# EAGLE board Tracker_V2 (EAGLE 9.6.2)
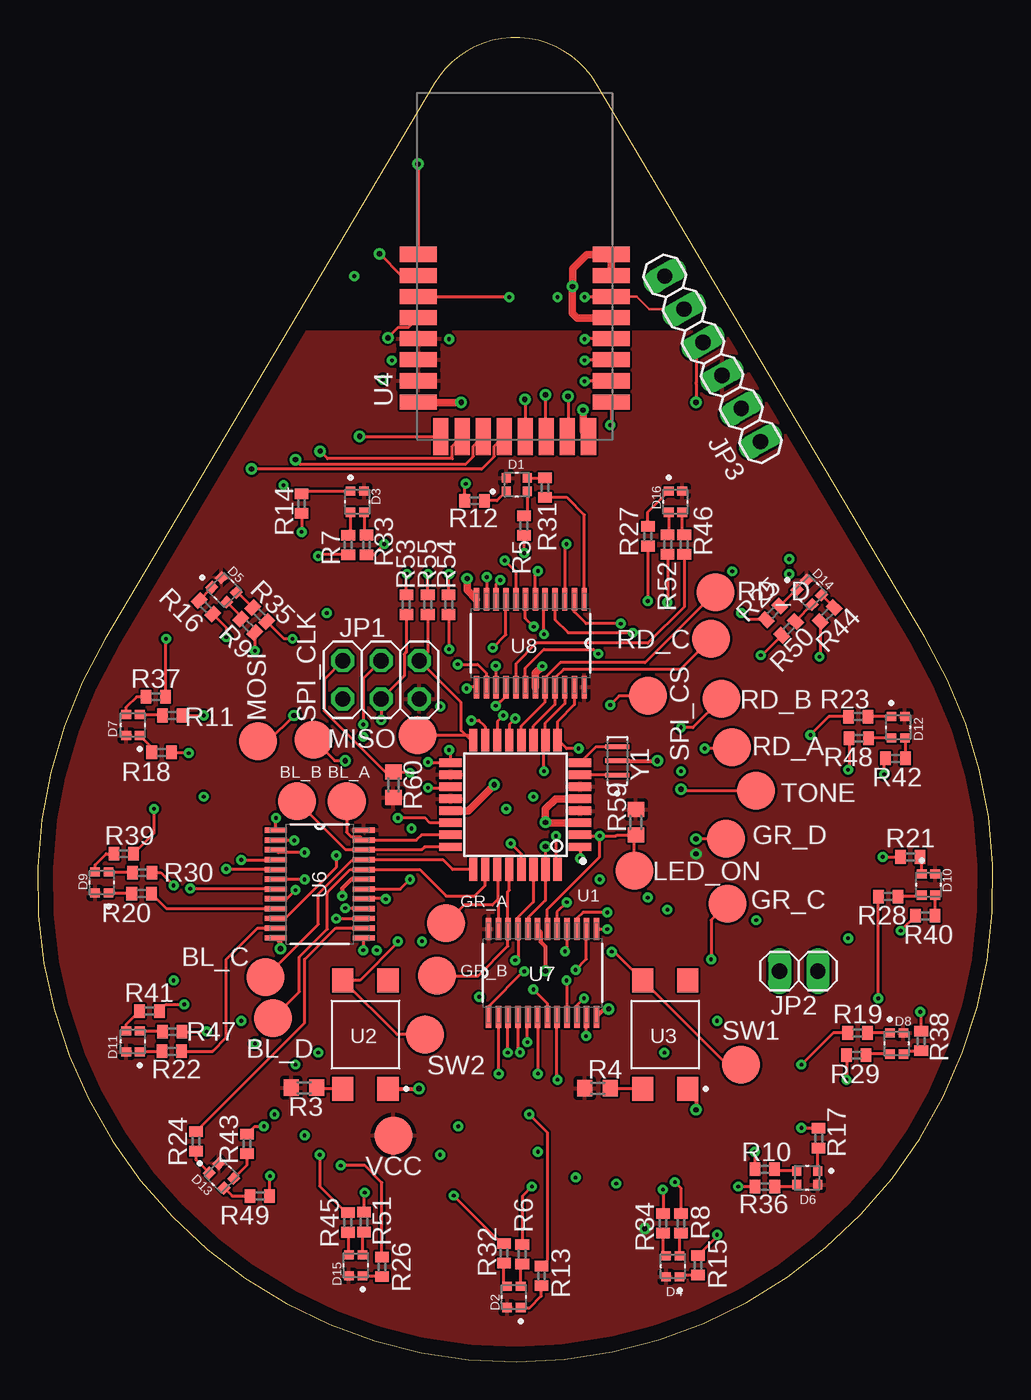
[diagram p0: board, top side]
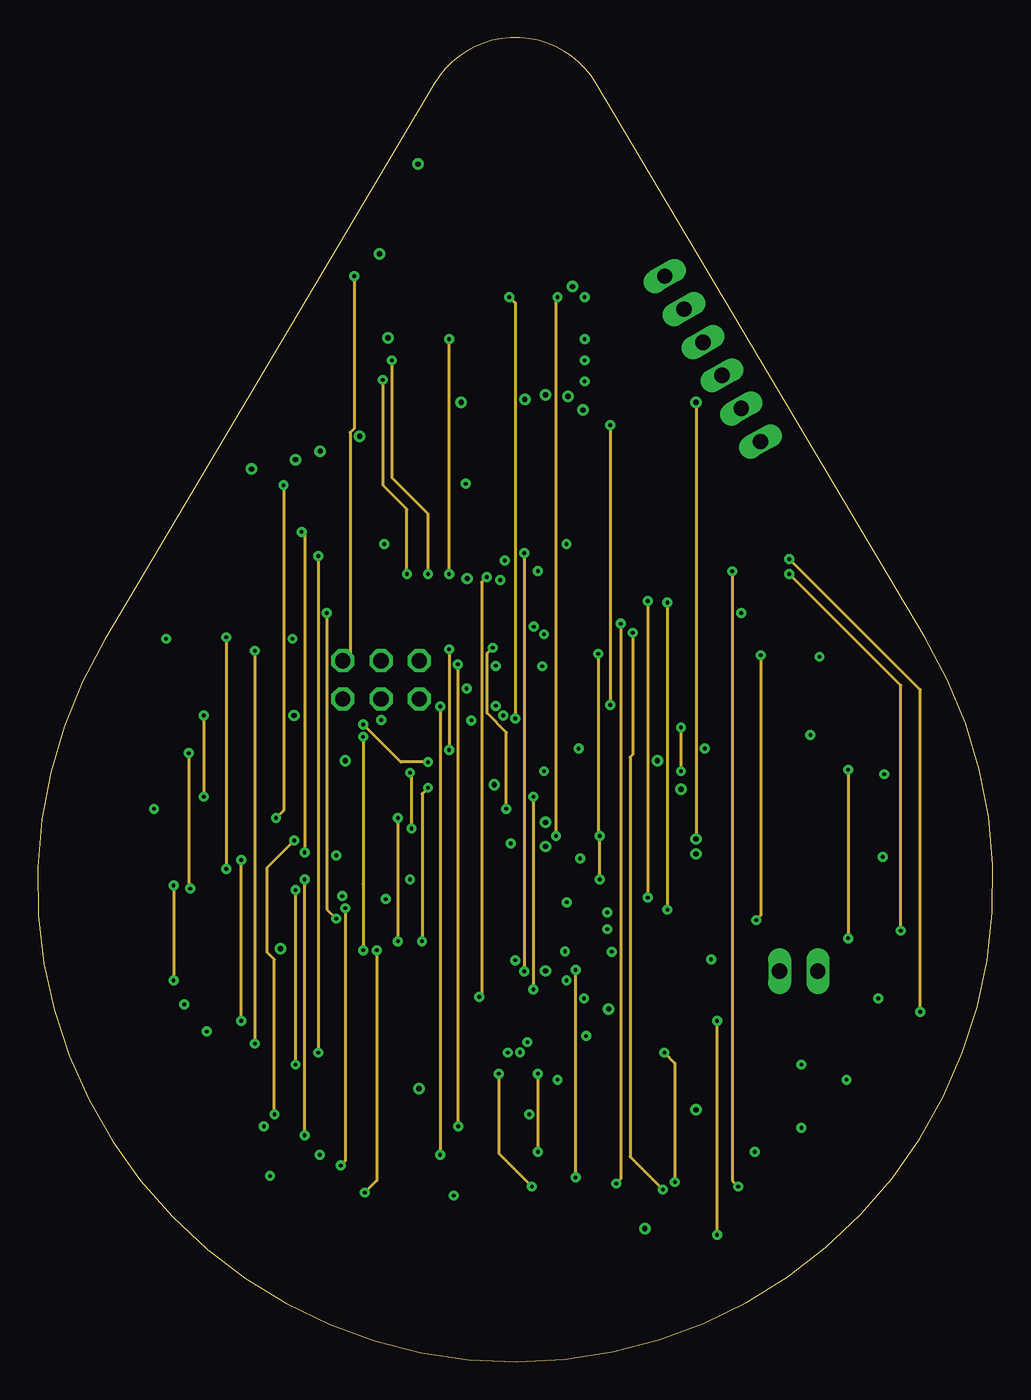
[diagram p1: board, inner layer Route2]
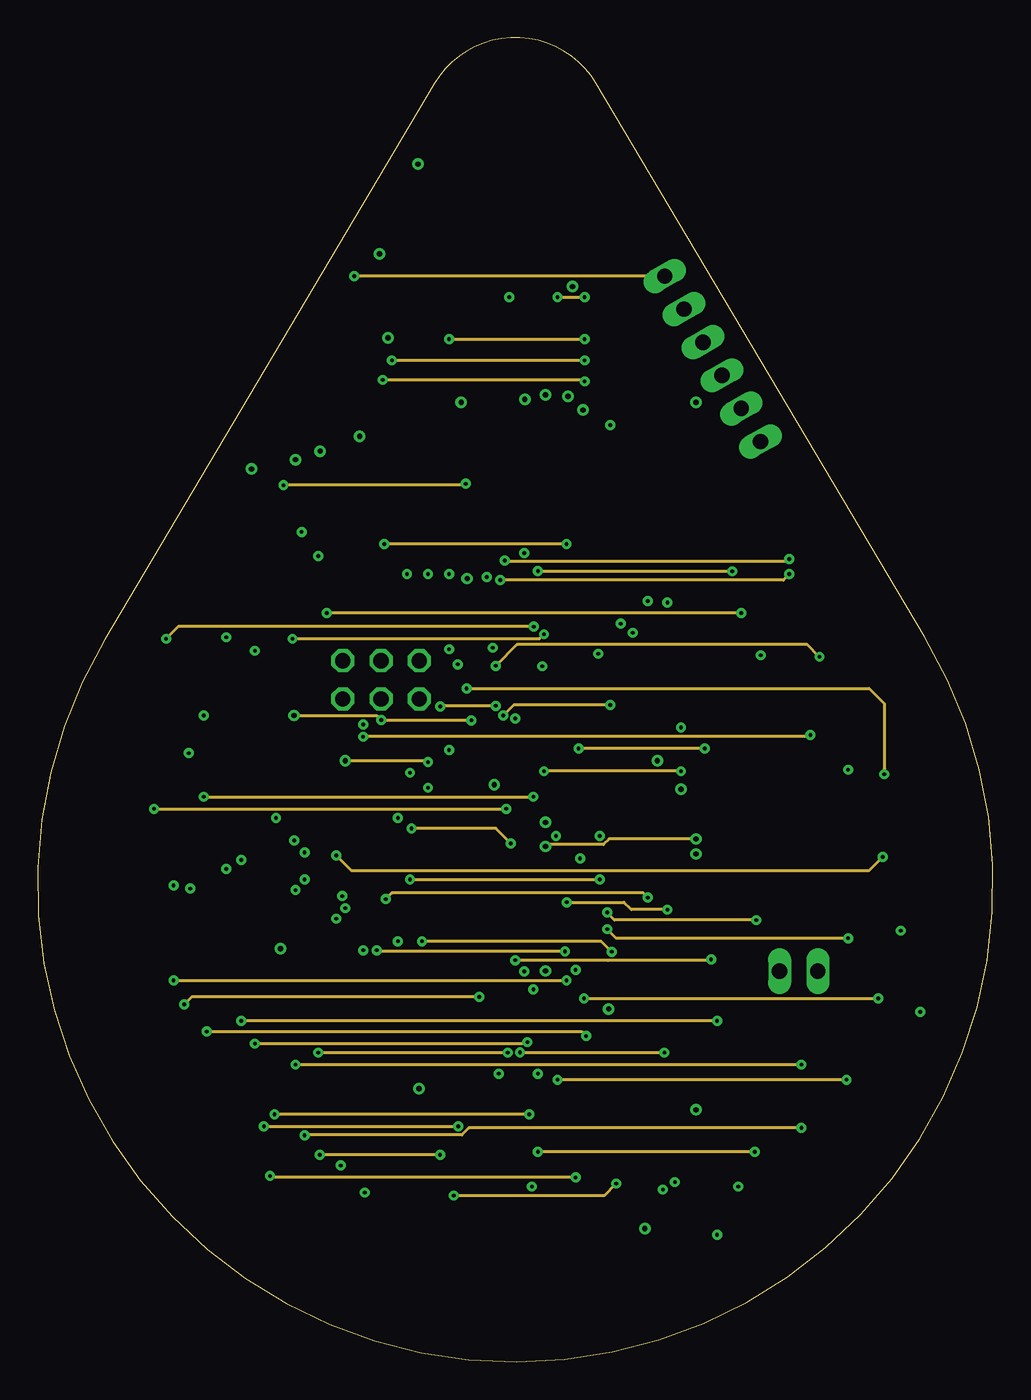
[diagram p2: board, inner layer Route15]
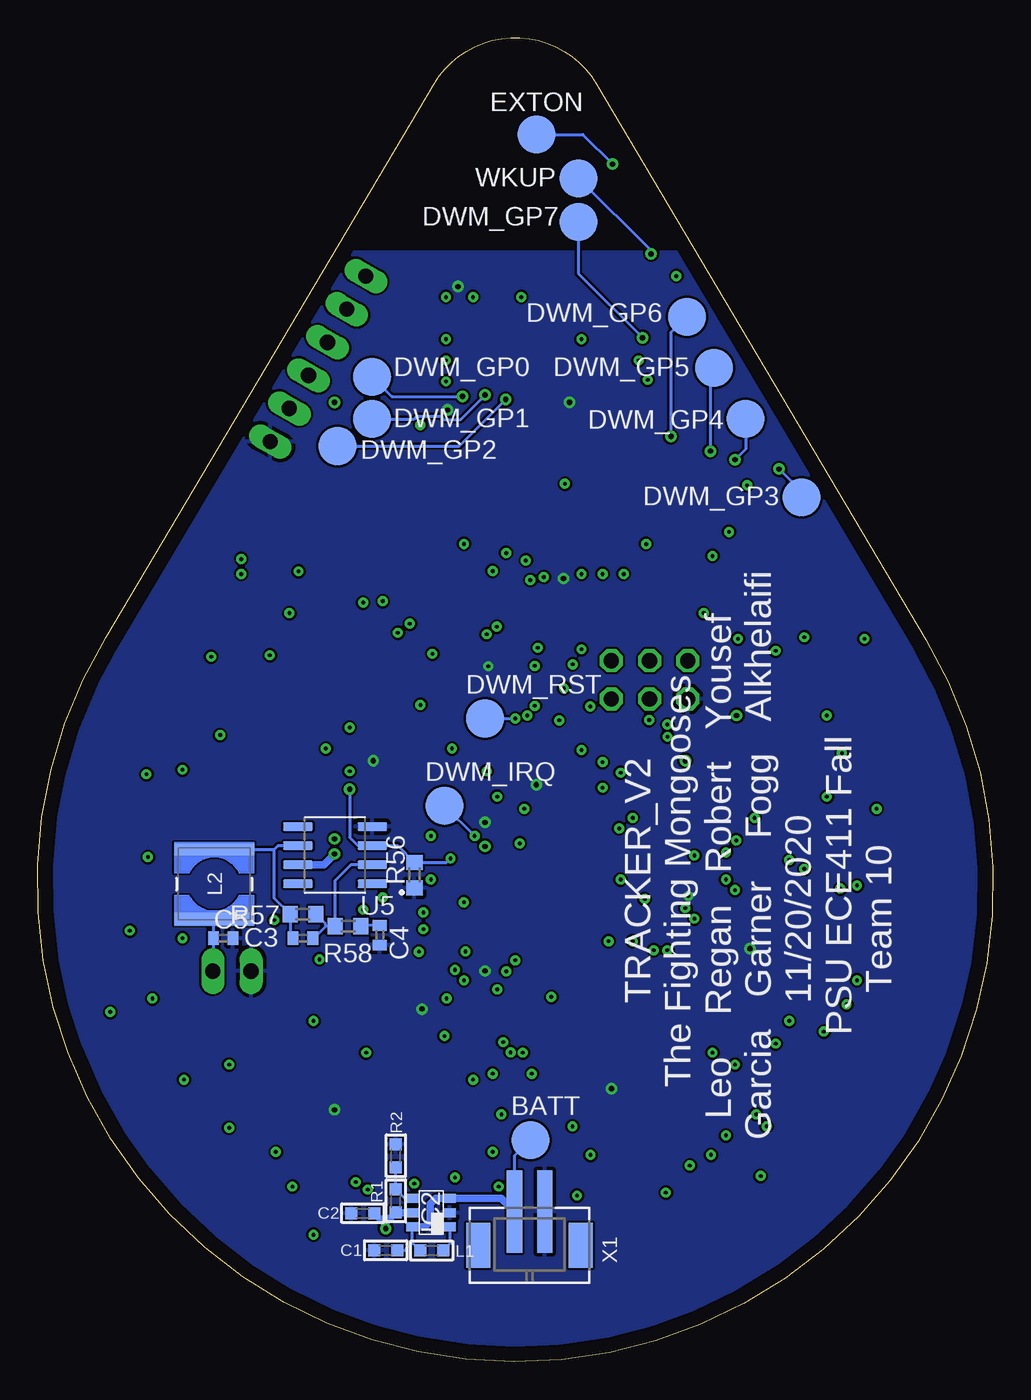
[diagram p3: board, bottom side, seen from below]

Size 63.45 x 87.99 mm. Coordinates in mm from the lower left corner, seen from the top.
Outline: 37.11,84.94 arc119 26.35,84.94
Outline: 37.11,84.94 arc119 26.35,84.94
Outline: 4.45,48 arc242 58.91,48.16
Outline: 26.35,84.94 4.45,48
Outline: 37.11,84.94 arc119 26.35,84.94
Outline: 58.91,48.16 37.11,84.94
Outline: 4.45,48 arc242 58.91,48.16
Copper layers (1+2*15+16): Top 0.035mm / dielectric 0.3mm / Route2 0.035mm / dielectric 1mm / Route15 0.035mm / dielectric 0.3mm / Bottom 0.035mm
Design rules "default *": minimum track width 6mil, minimum drill 0.25mm, track to track 6mil, track to pad 6mil, pad to pad 6mil, via to via 6mil, smd to smd 6mil, copper to edge 40mil, drill to drill 6mil, minimum pad ring 10mil, minimum via ring 8mil, stop-mask expansion 4mil, vias tented up to drill 0mil, thermal gap 10mil

## Footprints (pad centres in the part's own frame; a part is rotated, then mirrored left to right if it is on the bottom)
B2,54 = smd 2.54 x 2.54: TP 0,0
C0603 = smd 0.8 x 0.8: 1 -0.762,0; 2 0.762,0
C0402 = smd 0.7 x 0.9: 1 -0.65,0; 2 0.65,0
LED_EAST1616RGBA3 = smd 0.6 x 0.65: 1 0.7,0.45; 2 -0.7,0.45; 3 0.7,-0.45; 4 -0.7,-0.45
TSOT23-6_DDC = smd 0.6 x 0.8: 1 -0.95,-1.25; 2 0,-1.25; 3 0.95,-1.25; 4 0.95,1.25; 5 0,1.25; 6 -0.95,1.25
2X03 = drill 1.016 octagon: 1 -2.54,-1.27; 2 -2.54,1.27; 3 0,-1.27; 4 0,1.27; 5 2.54,-1.27; 6 2.54,1.27
1X02 = drill 1.016 long: 1 -1.27,0; 2 1.27,0
1X06 = drill 1.016 long: 1 -6.35,0; 2 -3.81,0; 3 -1.27,0; 4 1.27,0; 5 3.81,0; 6 6.35,0
L0603 = smd 0.8 x 0.8: 1 -0.762,0; 2 0.762,0
WE-TPC_4828 = smd 0.8 x 5.3: 1 -2.3,0; 2 2.3,0
R0603 = smd 0.8 x 0.8: 1 -0.762,0; 2 0.762,0
R0603' = smd 1 x 1.1: 1 -0.85,0; 2 0.85,0
R0402 = smd 0.7 x 0.9: 1 -0.65,0; 2 0.65,0
QFP80P900X900X120-32N = smd 1.5 x 0.55: 1 -4.3,2.8; 2 -4.3,2; 3 -4.3,1.2; 4 -4.3,0.4; 5 -4.3,-0.4; 6 -4.3,-1.2; 7 -4.3,-2; 8 -4.3,-2.8; 17 4.3,-2.8; 18 4.3,-2; 19 4.3,-1.2; 20 4.3,-0.4; 21 4.3,0.4; 22 4.3,1.2; 23 4.3,2; 24 4.3,2.8 | smd 0.55 x 1.5: 9 -2.8,-4.3; 10 -2,-4.3; 11 -1.2,-4.3; 12 -0.4,-4.3; 13 0.4,-4.3; 14 1.2,-4.3; 15 2,-4.3; 16 2.8,-4.3; 25 2.8,4.3; 26 2,4.3; 27 1.2,4.3; 28 0.4,4.3; 29 -0.4,4.3; 30 -1.2,4.3; 31 -2,4.3; 32 -2.8,4.3
SW_TL3305AF260QG = smd 1.4 x 1.6: 1 -1.5,3.6; 2 -1.5,-3.6; 3 1.5,3.6; 4 1.5,-3.6
XCVR_DWM1000 = smd 2.45 x 1: 1 -6.4,1.8; 2 -6.4,0.4; 3 -6.4,-1; 4 -6.4,-2.4; 5 -6.4,-3.8; 6 -6.4,-5.2; 7 -6.4,-6.6; 8 -6.4,-8; 17 6.4,-8; 18 6.4,-6.6; 19 6.4,-5.2; 20 6.4,-3.8; 21 6.4,-2.4; 22 6.4,-1; 23 6.4,0.4; 24 6.4,1.8 | smd 1 x 2.45: 9 -4.9,-10.295; 10 -3.5,-10.295; 11 -2.1,-10.295; 12 -0.7,-10.295; 13 0.7,-10.295; 14 2.1,-10.295; 15 3.5,-10.295; 16 4.9,-10.295
SOIC127P600X175-8N = smd 1.97 x 0.57: 1 -2.475,1.905; 2 -2.475,0.635; 3 -2.475,-0.635; 4 -2.475,-1.905; 5 2.475,-1.905; 6 2.475,-0.635; 7 2.475,0.635; 8 2.475,1.905
SOP65P640X110-24N = smd 1.473 x 0.356: 1 -2.921,3.581; 2 -2.921,2.921; 3 -2.921,2.286; 4 -2.921,1.626; 5 -2.921,0.965; 6 -2.921,0.33; 7 -2.921,-0.33; 8 -2.921,-0.965; 9 -2.921,-1.626; 10 -2.921,-2.286; 11 -2.921,-2.921; 12 -2.921,-3.581; 13 2.921,-3.581; 14 2.921,-2.921; 15 2.921,-2.286; 16 2.921,-1.626; 17 2.921,-0.965; 18 2.921,-0.33; 19 2.921,0.33; 20 2.921,0.965; 21 2.921,1.626; 22 2.921,2.286; 23 2.921,2.921; 24 2.921,3.581
B2B-PH-SM4-TB = smd 1 x 5.5: 1 1,0; 2 -1,0 | smd 1.6 x 3: M1 3.4,-2.25; M2 -3.4,-2.25
OSC_CSTCE16M0V53-R0 = smd 0.3 x 1.6: 1 -0.95,0; 2 0,0; 3 0.95,0

## Placement (x,y rotation side)
BATT  TPB2,54  [B2,54]  30.73,14.75 0 bottom
BL_A  TPB2,54  [B2,54]  20.53,37.25 0 top
BL_B  TPB2,54  [B2,54]  17.23,37.25 0 top
BL_C  TPB2,54  [B2,54]  15.13,25.55 0 top
BL_D  TPB2,54  [B2,54]  15.63,22.85 0 top
C1  10u  [C0603]  40.34,7.41 0 bottom
C2  10u  [C0603]  41.85,9.88 0 bottom
C3  47pF  [C0402]  45.83,28.15 0 bottom
C4  1uF  [C0402]  40.73,28.35 270 bottom
C5  4.7uF  [C0402]  51.13,28.15 0 bottom
D1  LED_EAST1616RGBA3  [LED_EAST1616RGBA3]  31.83,58.29 180 top
D2  LED_EAST1616RGBA3  [LED_EAST1616RGBA3]  31.63,4.31 270 top
D3  LED_EAST1616RGBA3  [LED_EAST1616RGBA3]  21.23,57.15 90 top
D4  LED_EAST1616RGBA3  [LED_EAST1616RGBA3]  42.19,6.35 270 top
D5  LED_EAST1616RGBA3  [LED_EAST1616RGBA3]  12.38,51.3 135 top
D6  LED_EAST1616RGBA3  [LED_EAST1616RGBA3]  51.11,12.23 0 top
D7  LED_EAST1616RGBA3  [LED_EAST1616RGBA3]  6.33,42.31 270 top
D8  LED_EAST1616RGBA3  [LED_EAST1616RGBA3]  57.06,21.15 90 top
D9  LED_EAST1616RGBA3  [LED_EAST1616RGBA3]  4.26,31.85 270 top
D10  LED_EAST1616RGBA3  [LED_EAST1616RGBA3]  59.17,31.71 90 top
D11  LED_EAST1616RGBA3  [LED_EAST1616RGBA3]  6.33,21.29 270 top
D12  LED_EAST1616RGBA3  [LED_EAST1616RGBA3]  57.16,42.17 90 top
D13  LED_EAST1616RGBA3  [LED_EAST1616RGBA3]  12.21,12.37 135 top
D14  LED_EAST1616RGBA3  [LED_EAST1616RGBA3]  51.25,51.13 135 top
D15  LED_EAST1616RGBA3  [LED_EAST1616RGBA3]  21.13,6.42 270 top
D16  LED_EAST1616RGBA3  [LED_EAST1616RGBA3]  42.36,57.15 90 top
DWM_GP0  TPB2,54  [B2,54]  41.23,65.45 0 bottom
DWM_GP1  TPB2,54  [B2,54]  41.23,62.65 0 bottom
DWM_GP2  TPB2,54  [B2,54]  43.53,60.85 0 bottom
DWM_GP3  TPB2,54  [B2,54]  12.73,57.45 0 bottom
DWM_GP4  TPB2,54  [B2,54]  16.43,62.65 0 bottom
DWM_GP5  TPB2,54  [B2,54]  18.53,66.05 0 bottom
DWM_GP6  TPB2,54  [B2,54]  20.33,69.45 0 bottom
DWM_GP7  TPB2,54  [B2,54]  27.53,75.75 0 bottom
DWM_IRQ  TPB2,54  [B2,54]  36.43,36.95 0 bottom
DWM_RST  TPB2,54  [B2,54]  33.73,42.75 0 bottom
EXTON  TPB2,54  [B2,54]  30.33,81.55 0 bottom
GR_A  TPB2,54  [B2,54]  27.13,29.15 0 top
GR_B  TPB2,54  [B2,54]  26.53,25.65 0 top
GR_C  TPB2,54  [B2,54]  45.83,30.45 0 top
GR_D  TPB2,54  [B2,54]  45.73,34.75 0 top
IC2  TPS61070DDC  [TSOT23-6_DDC]  37.32,9.91 90 bottom
JP1  [2X03]  22.81,45.32 180 top
JP2  [1X02]  50.55,25.97 180 top
JP3  [1X06]  44.83,66.65 120 top
L1  4.7u  [L0603]  37.28,7.4 180 bottom
L2  1500uH  [WE-TPC_4828]  51.73,31.75 270 bottom
LED_ON  TPB2,54  [B2,54]  39.63,32.65 0 top
MISO  TPB2,54  [B2,54]  25.23,41.65 0 top
MOSI  TPB2,54  [B2,54]  14.63,41.25 0 top
R1  1M  [R0603]  39.66,10.7 270 bottom
R2  178k  [R0603]  39.66,13.7 270 bottom
R3  10k  [R0603']  17.7,18.21 0 top
R4  10k  [R0603']  37.19,18.18 0 top
R5  750 1%  [R0402]  32.29,55.56 90 top
R6  750 1%  [R0402]  32.19,7.16 270 top
R7  750 1%  [R0402]  20.63,54.28 90 top
R8  750 1%  [R0402]  42.73,9.2 270 top
R9  750 1%  [R0402]  13.95,48.91 135 top
R10  750 1%  [R0402]  48.3,12.8 0 top
R11  750 1%  [R0402]  8.93,42.95 180 top
R12  750 1%  [R0402]  29.02,57.22 0 top
R13  750 1%  [R0402]  33.46,5.71 270 top
R14  750 1%  [R0402]  17.53,57.03 90 top
R15  750 1%  [R0402]  43.87,6.42 270 top
R16  750 1%  [R0402]  11.18,50.14 135 top
R17  750 1%  [R0402]  51.88,14.87 270 top
R18  750 1%  [R0402]  8.23,40.5 180 top
R19  750 1%  [R0402]  54.46,21.86 0 top
R20  750 1%  [R0402]  6.9,31.12 180 top
R21  750 1%  [R0402]  57.97,33.55 0 top
R22  750 1%  [R0402]  8.92,20.64 180 top
R23  750 1%  [R0402]  54.5,42.88 0 top
R24  750 1%  [R0402]  10.52,14.66 270 top
R25  750 1%  [R0402]  48.84,49.77 45 top
R26  750 1%  [R0402]  22.87,6.31 270 top
R27  750 1%  [R0402]  40.53,54.86 90 top
R28  750 1%  [R0402]  56.49,30.92 0 top
R29  750 1%  [R0402]  54.38,20.38 0 top
R30  750 1%  [R0402]  6.94,32.51 180 top
R31  750 1%  [R0402]  33.7,58.09 90 top
R32  750 1%  [R0402]  30.97,7.22 270 top
R33  750 1%  [R0402]  21.84,54.29 90 top
R34  750 1%  [R0402]  41.54,9.2 270 top
R35  750 1%  [R0402]  14.75,49.66 135 top
R36  750 1%  [R0402]  48.31,11.64 0 top
R37  750 1%  [R0402]  7.85,44.19 180 top
R38  750 1%  [R0402]  58.69,21.32 270 top
R39  750 1%  [R0402]  5.71,33.76 180 top
R40  750 1%  [R0402]  58.96,29.64 0 top
R41  750 1%  [R0402]  7.43,23.32 180 top
R42  750 1%  [R0402]  56.98,40.1 0 top
R43  750 1%  [R0402]  13.91,14.5 270 top
R44  750 1%  [R0402]  52.44,49.66 45 top
R45  750 1%  [R0402]  20.6,9.26 270 top
R46  750 1%  [R0402]  42.95,54.31 90 top
R47  750 1%  [R0402]  8.94,21.94 180 top
R48  750 1%  [R0402]  54.55,41.44 0 top
R49  750 1%  [R0402]  14.76,11.03 180 top
R50  750 1%  [R0402]  49.88,48.74 45 top
R51  750 1%  [R0402]  21.67,9.29 270 top
R52  750 1%  [R0402]  41.85,54.32 90 top
R53  0  [R0402]  24.49,50.31 90 top
R54  0  [R0402]  27.3,50.31 90 top
R55  0  [R0402]  25.91,50.31 90 top
R56  1M  [R0603']  38.43,32.35 90 bottom
R57  220k  [R0603']  45.83,29.75 0 bottom
R58  10k  [R0603']  42.83,28.95 180 bottom
R59  10k  [R0603']  39.73,35.85 90 top
R60  10k  [R0603']  23.63,38.35 270 top
RD_A  TPB2,54  [B2,54]  46.13,40.85 0 top
RD_B  TPB2,54  [B2,54]  45.43,44.05 0 top
RD_C  TPB2,54  [B2,54]  44.73,48.05 0 top
RD_D  TPB2,54  [B2,54]  45.03,51.15 0 top
SPI_CLK  TPB2,54  [B2,54]  18.33,41.35 0 top
SPI_CS  TPB2,54  [B2,54]  40.53,44.25 270 top
SW1  TPB2,54  [B2,54]  46.73,19.75 0 top
SW2  TPB2,54  [B2,54]  25.73,21.75 0 top
TONE  TPB2,54  [B2,54]  47.73,37.95 0 top
U1  ATMEGA328P-AU  [QFP80P900X900X120-32N]  31.73,37.02 180 top
U2  TL3305AF260QG  [SW_TL3305AF260QG]  21.77,21.75 180 top
U3  TL3305AF260QG  [SW_TL3305AF260QG]  41.69,21.75 180 top
U4  DWM1000  [XCVR_DWM1000]  31.69,71.79 0 top
U5  UA741CD  [SOIC127P600X175-8N]  43.7,33.67 180 bottom
U6  74HC154PW-118  [SOP65P640X110-24N]  18.73,31.75 0 top
U7  74HC154PW-118  [SOP65P640X110-24N]  33.53,25.85 90 top
U8  74HC154PW-118  [SOP65P640X110-24N]  32.73,47.75 270 top
VCC  TPB2,54  [B2,54]  23.63,15.05 0 top
WKUP  TPB2,54  [B2,54]  27.53,78.65 0 bottom
X1  B2B-PH-SM4-TB  [B2B-PH-SM4-TB]  30.78,9.99 0 bottom
Y1  CSTCE16M0V53-R0  [OSC_CSTCE16M0V53-R0]  38.51,39.93 90 top

## Library data of the parts
BATT BL_A BL_B BL_C BL_D DWM_GP0 DWM_GP1-DWM_GP7 DWM_IRQ DWM_RST EXTON GR_A GR_B GR_C GR_D LED_ON MISO MOSI RD_A RD_B RD_C RD_D SPI_CLK SPI_CS SW1 SW2 TONE VCC WKUP = testpad
C1 C2 = rc-master-smd; C1: 10uF
C3-C5 = rcl; SPICEPREFIX: C
D1-D16 = LED_EAST1616RGBA3
IC2 = texas; MPN: TPS61070DDCR; OC_FARNELL: 1461062; OC_NEWARK: 64M3125
JP1-JP3 = pinhead
L1 = rc-master-smd; L1: 4.7uH
L2 = Eagle_WE-TPC_rev19a; DATASHEET-URL: https://katalog.we-online.com/pbs/datasheet/744043152.pdf; FRES: 2MHz; IR: 0.09A; ISAT: 0.05A; PART-NUMBER: 744043152; RDC-MAX: 9000mOhm; RDC-TYP: 6800mOhm
R1 R2 = rc-master-smd
R3-R55 = resistor
R56-R60 = rcl; SPICEPREFIX: R
U1 = ATMEGA328P-AU; AVAILABILITY: Good; DESCRIPTION: AVR AVR® ATmega Microcontroller IC 8-Bit 20MHz 32KB (16K x 16) FLASH 32-TQFP (7x7); MF: Microchip Technology; MP: ATMEGA328P-AU; PACKAGE: TQFP-32 Microchip Technology; PRICE: None; PURCHASE-URL: https://pricing.snapeda.com/search/part/ATMEGA328P-AU/?ref=eda
U2 U3 = TL3305AF260QG; AVAILABILITY: Warning; DESCRIPTION: Tactile Switch SPST-NO Top Actuated Surface Mount; MF: E-Switch; MP: TL3305AF260QG; PACKAGE: LQFP-48 E-Switch; PRICE: None; PURCHASE-URL: https://pricing.snapeda.com/search/part/TL3305AF260QG/?ref=eda
U4 = DWM1000; AVAILABILITY: Warning; DESCRIPTION: 802.15.4 IR-UWB Transceiver Module 3.5GHz ~ 6.5GHz Integrated, Chip Surface Mount; MF: Decawave Limited; MP: DWM1000; PACKAGE: Module Decawave; PRICE: None; PURCHASE-URL: https://pricing.snapeda.com/search/part/DWM1000/?ref=eda
U5 = UA741CD; AVAILABILITY: Good; DESCRIPTION: General Purpose Amplifier 1 Circuit 8-SO; MF: STMicroelectronics; MP: UA741CD; PACKAGE: SOIC-8 STMicroelectronics; PRICE: None; PURCHASE-URL: https://pricing.snapeda.com/search/part/UA741CD/?ref=eda
U6-U8 = 74HC154PW-118
X1 = con-JST PH
Y1 = CSTCE16M0V53-R0; AVAILABILITY: Bad; DESCRIPTION: 16MHz Ceramic Resonator Built in Capacitor 15pF ±0.3% -20°C ~ 80°C Surface Mount; MF: Murata; MP: CSTCE16M0V53-R0; PACKAGE: SMD-3 Murata; PRICE: None

## Nets
BL_A: BL_A.TP U1.23 U6.23
BL_B: BL_B.TP U1.24 U6.22
BL_C: BL_C.TP U1.25 U6.21
BL_D: BL_D.TP U1.26 U6.20
GND: C1.1 C2.1 C4.2 C5.2 IC2.2 JP1.6 JP2.2 JP3.1 R2.1 R56.1 U1.3 U1.5 U1.21 U2.1 U3.1 U4.8 U4.16 U4.21 U4.23 U4.24 U5.4 U6.12 U6.19 U7.12 U7.19 U8.12 U8.19 X1.1 Y1.2
GR_A: GR_A.TP U1.27 U7.23
GR_B: GR_B.TP U1.28 U7.22
GR_C: GR_C.TP U1.30 U7.21
GR_D: GR_D.TP JP3.4 U1.31 U7.20
LED_ON: LED_ON.TP R59.1 U1.2 U6.18 U7.18 U8.18
N$1: IC2.1 L1.1
N$2: BATT.TP C1.2 IC2.3 IC2.6 L1.2 X1.2
N$3: R4.2 U3.3
N$4: D1.1 R12.2
N$5: R3.2 U2.3
N$6: IC2.4 R1.1 R2.2
N$7: D7.1 R18.2
N$8: D3.1 R14.2
N$9: D4.1 R15.2
N$10: D5.1 R16.2
N$11: D6.1 R17.2
N$12: D2.1 R13.2
N$13: D8.1 R19.2
N$14: D9.1 R20.2
N$15: D10.1 R21.2
N$16: D11.1 R22.2
N$17: D12.1 R23.2
N$18: D13.1 R24.2
N$19: D14.1 R25.2
N$20: D15.1 R26.2
N$21: D16.1 R27.2
N$22: R5.1 U7.1
N$23: R6.1 U7.2
N$24: R7.1 U7.3
N$25: D4.2 R8.2
N$26: D5.2 R9.2
N$27: D7.2 R11.2
N$28: D6.2 R10.2
N$29: D8.2 R29.2
N$30: D9.2 R30.2
N$31: R28.1 U7.10
N$32: D11.2 R47.2
N$33: D12.2 R48.2
N$34: R49.1 U7.14
N$35: R50.1 U7.15
N$36: R51.1 U7.16
N$37: R52.1 U7.17
N$38: D16.4 R46.2
N$39: D15.4 R45.2
N$40: D14.4 R44.2
N$41: D13.4 R43.2
N$42: D12.4 R42.2
N$43: D11.4 R41.2
N$44: D10.4 R40.2
N$45: D9.4 R39.2
N$46: D8.4 R38.2
N$47: D7.4 R37.2
N$48: D6.4 R36.2
N$49: D5.4 R35.2
N$50: D4.4 R34.2
N$51: D3.4 R33.2
N$52: D2.4 R32.2
N$53: D1.4 R31.2
N$54: D1.2 R5.2
N$55: D2.2 R6.2
N$56: D3.2 R7.2
N$57: R8.1 U7.4
N$58: R9.1 U7.5
N$59: R10.1 U7.6
N$60: R11.1 U7.7
N$61: R12.1 U6.1
N$62: R13.1 U6.2
N$63: R14.1 U6.3
N$64: R15.1 U6.4
N$65: R16.1 U6.5
N$66: R17.1 U6.6
N$67: R18.1 U6.7
N$68: R19.1 U6.8
N$69: R20.1 U6.9
N$70: R21.1 U6.10
N$71: R22.1 U6.11
N$72: R23.1 U6.13
N$73: R24.1 U6.14
N$74: R25.1 U6.15
N$75: R26.1 U6.16
N$76: R27.1 U6.17
N$77: R29.1 U7.8
N$78: R30.1 U7.9
N$79: D10.2 R28.2
N$80: R31.1 U8.1
N$81: R32.1 U8.2
N$82: R33.1 U8.3
N$83: R34.1 U8.4
N$84: R35.1 U8.5
N$85: R36.1 U8.6
N$86: R37.1 U8.7
N$87: R38.1 U8.8
N$88: R39.1 U8.9
N$89: R40.1 U8.10
N$90: R41.1 U8.11
N$91: R42.1 U8.13
N$92: R43.1 U8.14
N$93: R44.1 U8.15
N$94: R45.1 U8.16
N$95: R46.1 U8.17
N$96: R47.1 U7.11
N$97: R48.1 U7.13
N$98: D13.2 R49.2
N$99: D14.2 R50.2
N$100: D15.2 R51.2
N$101: D16.2 R52.2
N$102: SPI_CS.TP U1.14 U4.17
N$103: JP1.4 MOSI.TP R53.1 U1.15
N$104: JP1.1 MISO.TP R55.1 U1.16
N$105: JP1.3 R54.1 SPI_CLK.TP U1.17
N$106: DWM_RST.TP U1.13 U4.3
N$107: DWM_IRQ.TP JP3.5 U1.32 U4.22
N$108: U1.8 Y1.3
N$109: U1.7 Y1.1
N$110: JP1.5 JP3.6 R60.1 U1.29
N$111: R53.2 U4.18
N$112: R54.2 U4.20
N$113: R55.2 U4.19
N$114: R56.2 TONE.TP U1.1 U5.3
N$115: C3.1 L2.1 R57.1 U5.6
N$116: C5.1 JP2.1 L2.2
N$117: C3.2 R57.2 R58.2 U5.2
N$118: C4.1 R58.1
N$119: DWM_GP7.TP U4.4
N$120: DWM_GP6.TP U4.9
N$121: DWM_GP5.TP U4.10
N$122: DWM_GP4.TP U4.11
N$123: DWM_GP3.TP U4.12
N$124: DWM_GP2.TP U4.13
N$125: DWM_GP1.TP U4.14
N$126: DWM_GP0.TP U4.15
N$127: U4.2 WKUP.TP
N$128: EXTON.TP U4.1
RD_A: RD_A.TP U1.9 U8.23
RD_B: RD_B.TP U1.10 U8.22
RD_C: RD_C.TP U1.11 U8.21
RD_D: RD_D.TP U1.12 U8.20
SW1: SW1.TP U1.19 U3.4
SW2: SW2.TP U1.22 U2.4
VCC: C2.2 D1.3 D2.3 D3.3 D4.3 D5.3 D6.3 D7.3 D8.3 D9.3 D10.3 D11.3 D12.3 D13.3 D14.3 D15.3 D16.3 IC2.5 JP1.2 JP3.3 R1.2 R3.1 R4.1 R59.2 R60.2 U1.4 U1.6 U1.18 U1.20 U4.5 U4.6 U4.7 U5.7 U6.24 U7.24 U8.24 VCC.TP

## Tracks (layer width: path | path; a pad name or v marks a point on that pad's centre or on a via)
BL_A
  Top 0.2: U1.23 25.5,35.02 25.15,34.67 U6.23 21.42,34.9 20.81,34.9 20.53,35.18 BL_A.TP
BL_B
  Top 0.2: U1.24 25.7,34.22 25.52,34.04 U6.22 20.44,34.04 BL_B.TP
BL_C
  Top 0.2: U1.25 27.56,32.72 26.9,33.38 U6.21 21.62,33.34 20.91,33.34 18.65,31.08 18.65,29.07 BL_C.TP
BL_D
  Top 0.2: U1.26 29.73,31.65 29.03,30.95 27.13,30.95 25.37,32.71 U6.20 20.78,32.71 19.25,31.19 19.25,28.77 17.38,26.9 17.38,24.6 BL_D.TP
GND  (via drill 0.25, 0.35)
  Top 0.254: Y1.2 41.14,39.93 v41.16,39.95 | U6.12 16.13,27.85 v16.13,27.45 | U6.19 20.86,32.08 20.23,31.45 v20.23,30.95 | U7.12 37.63,23.45 v37.93,23.45 | U7.19 33.4,28.57 33.4,27.92 33.73,27.59 v33.73,25.98 | U3.1 43.73,17.61 v43.73,16.75 | U2.1 v25.33,18.15
  Top 0.508: U8.12 28.53,51.29 v28.53,52.05 | U4.8 25.33,63.75 v28.13,63.75 | U4.21 38.05,69.35 35.83,69.35 35.5,69.68 35.5,71.41 v35.53,71.45 35.53,72.65 36.47,73.59 U4.24 U4.23 | v36.23,63.25 36.23,61.85 U4.16 | U1.21 28.6,36.62 v30.33,38.35 | U1.3 33.76,35.82 v33.73,35.85 33.73,36.75 34.4,37.42 U1.5 | U8.19 33.06,45.76 v33.52,46.22
  pour Bottom: -7.27,73.75 67.73,73.75 67.73,-2.25 70.73,-5.25 -7.27,-5.25 -9.27,-3.25 -9.27,71.75
GR_A
  Top 0.2: 30.61,30.75 30.61,32.64 U1.27 | 30.61,30.75 U7.23 | GR_A.TP 28.33,30.35 30.21,30.35 30.61,30.75
GR_B
  Top 0.2: U1.28 31.33,31.35 31.23,31.25 31.23,28.78 U7.22 31.24,27.63 29.26,25.65 GR_B.TP
GR_C  (via drill 0.25)
  Top 0.2: U1.30 32.93,30.55 31.9,29.52 U7.21 31.93,28.74 31.93,26.89 v31.73,26.69 | GR_C.TP 44.73,29.35 v44.73,26.75
  Route15 0.2: v31.73,26.69 37.87,26.69 37.89,26.67 44.65,26.67 v44.73,26.75
GR_D  (via drill 0.35)
  Top 0.2: U7.20 32.57,29.48 33.73,30.65 U1.31 v33.73,34.25 | JP3.4 43.73,67.28 43.73,65.08 43.72,65.03 43.73,65 v43.73,63.75 | GR_D.TP v43.73,34.75
  Route2 0.2: v43.73,63.75 v43.73,34.75
  Route15 0.2: v43.73,34.75 37.95,34.75 37.57,34.37 33.85,34.37 v33.73,34.25
LED_ON  (via drill 0.25)
  Top 0.2: U1.2 36.1,34.95 v37.33,34.95 | v37.33,34.95 38.43,34.95 38.48,35 R59.1 39.63,34.9 LED_ON.TP | U7.18 33.86,30.08 37.33,33.55 v37.33,34.95 | U8.18 32.4,46.12 33.63,47.35 36.93,47.35 v37.23,47.05 | U6.18 24.1,31.42 v24.73,32.05
  Route2 0.2: v37.23,47.05 37.23,35.05 v37.33,34.95 v37.33,32.05
  Route15 0.2: v24.73,32.05 v37.33,32.05
N$1
  Bottom 0.2: IC2.1 36.07,7.85 L1.1
N$2
  Bottom 0.2: L1.2 38.57,7.93 | 38.57,7.93 IC2.6 | C1.2 39.09,7.41 38.57,7.93 | BATT.TP 31.78,13.7 X1.2
  Bottom 0.508: X1.2 32.65,10.86 IC2.3 37.02,10.86 37.36,10.52 37.36,9.34 37.75,8.96 IC2.6
N$3
  Top 0.2: R4.2 40.16,18.18 U3.3
N$4
  Top 0.2: D1.1 30.51,57.22 R12.2
N$5
  Top 0.2: U2.3 18.64,18.15 R3.2
N$6
  Bottom 0.2: IC2.4 39.06,10.86 R1.1 R2.2
N$7
  Top 0.2: D7.1 7.58,40.81 R18.2
N$8
  Top 0.2: R14.2 17.7,57.85 D3.1
N$9
  Top 0.2: D4.1 42.76,5.77 R15.2
N$10
  Top 0.2: R16.2 11.57,51.45 D5.1
N$11
  Top 0.2: D6.1 51.81,14.15 R17.2
N$12
  Top 0.2: D2.1 32.69,3.61 33.46,4.38 R13.2
N$13
  Top 0.2: D8.1 R19.2
N$14
  Top 0.2: D9.1 6.22,31.15 R20.2
N$15
  Top 0.2: D10.1 58.72,33.45 R21.2
N$16
  Top 0.2: D11.1 6.83,20.64 R22.2
N$17
  Top 0.2: D12.1 R23.2
N$18
  Top 0.2: D13.1 10.52,13.42 R24.2
N$19
  Top 0.2: R25.2 50.38,51.31 D14.1
N$20
  Top 0.2: D15.1 22.81,5.72 R26.2
N$21
  Top 0.2: R27.2 40.53,56.47 D16.1
N$22  (via drill 0.25)
  Top 0.2: R5.1 32.29,53.79 v32.33,53.75 | U7.1 29.95,23.63 32.27,25.95 v32.33,25.95
  Route2 0.2: v32.33,53.75 v32.33,25.95
N$23  (via drill 0.25)
  Top 0.2: U7.2 30.61,19.17 v30.63,19.15 | v32.83,11.65 32.19,11.01 R6.1
  Route2 0.2: v30.63,19.15 30.63,13.85 v32.83,11.65
N$24  (via drill 0.25)
  Top 0.2: R7.1 18.71,53.63 v18.63,53.55 | U7.3 31.23,22.91 v31.23,20.55
  Route2 0.2: v18.63,53.55 v18.63,20.55
  Route15 0.2: v18.63,20.55 v31.23,20.55
N$25
  Top 0.2: D4.2 42.64,8.46 R8.2
N$26
  Top 0.2: D5.2 13.49,49.55 R9.2
N$27
  Top 0.2: D7.2 8.22,43.01 R11.2
N$28
  Top 0.2: D6.2 49.07,12.68 R10.2
N$29
  Top 0.2: D8.2 55.1,20.45 R29.2
N$30
  Top 0.2: D9.2 6.25,32.55 R30.2
N$31  (via drill 0.25)
  Top 0.2: U7.10 35.82,23.67 v36.29,24.15 | v55.83,24.15 R28.1
  Route15 0.2: v36.29,24.15 v55.83,24.15
N$32
  Top 0.2: D11.2 8.24,21.99 R47.2
N$33
  Top 0.2: D12.2 55.23,41.47 R48.2
N$34  (via drill 0.25)
  Top 0.2: R49.1 15.41,12.33 v15.43,12.35 | U7.14 36.45,26.77 v35.73,26.05
  Route2 0.2: v35.73,12.25 35.71,12.27 35.71,26.03 v35.73,26.05
  Route15 0.2: v35.73,12.25 15.53,12.25 v15.43,12.35
N$35  (via drill 0.25)
  Top 0.2: R50.1 48.09,46.95 v48.03,46.95 | U7.15 35.82,29.45 36.23,29.87 v37.83,29.87
  Route2 0.2: v48.03,46.95 48.03,29.65 v47.73,29.35
  Route15 0.2: v47.73,29.35 38.31,29.35 37.83,29.83 v37.83,29.87
N$36  (via drill 0.25)
  Top 0.2: U7.16 35.16,27.39 v35.03,27.27 | v21.73,11.25 21.67,11.19 R51.1
  Route2 0.2: v22.53,27.35 22.53,12.05 v21.73,11.25
  Route15 0.2: v35.03,27.27 22.61,27.27 v22.53,27.35
N$37  (via drill 0.25)
  Top 0.2: R52.1 41.85,50.47 v41.83,50.45 | U7.17 34.5,29.89 v35.14,30.54
  Route2 0.2: v41.83,50.45 v41.83,30.05
  Route15 0.2: v41.83,30.05 39.43,30.05 38.94,30.54 v35.14,30.54
N$38
  Top 0.2: R46.2 42.81,55.1 D16.4
N$39
  Top 0.2: D15.4 20.68,8.53 R45.2
N$40
  Top 0.2: R44.2 D14.4
N$41
  Top 0.2: D13.4 13.91,13.08 R43.2
N$42
  Top 0.2: D12.4 57.63,41.45 R42.2
N$43
  Top 0.2: D11.4 5.88,22.42 R41.2
N$44
  Top 0.2: R40.2 D10.4
N$45
  Top 0.2: D9.4 3.81,33.03 4.54,33.76 R39.2
N$46
  Top 0.2: D8.4 57.73,20.67 R38.2
N$47
  Top 0.2: D7.4 5.88,43.5 6.57,44.19 R37.2
N$48
  Top 0.2: D6.4 50.27,11.64 R36.2
N$49
  Top 0.2: D5.4 13.29,51.12 R35.2
N$50
  Top 0.2: D4.4 41.54,7.25 R34.2
N$51
  Top 0.2: D3.4 21.73,56.4 21.73,55.05 R33.2
N$52
  Top 0.2: D2.4 30.97,5.22 R32.2
N$53
  Top 0.2: D1.4 R31.2
N$54
  Top 0.2: D1.2 32.53,56.45 R5.2
N$55
  Top 0.2: D2.2 32.08,6.4 R6.2
N$56
  Top 0.2: D3.2 20.78,55.08 R7.2
N$57  (via drill 0.25)
  Top 0.2: U7.4 31.9,20.7 v32.04,20.57 | v42.33,11.95 42.73,11.55 R8.1
  Route2 0.2: v41.63,20.55 42.33,19.85 v42.33,11.95
  Route15 0.2: v32.04,20.57 41.61,20.57 v41.63,20.55
N$58  (via drill 0.25)
  Top 0.2: R9.1 14.41,47.27 v14.43,47.25 | v32.53,21.25 32.53,22.89 U7.5
  Route2 0.2: v14.43,47.25 v14.43,21.15
  Route15 0.2: v14.43,21.15 32.43,21.15 v32.53,21.25
N$59  (via drill 0.25)
  Top 0.2: R10.1 47.65,13.93 v47.63,13.95 | U7.6 33.23,22.9 v33.23,19.15
  Route2 0.2: v33.23,19.15 v33.23,13.95
  Route15 0.2: v47.63,13.95 v33.23,13.95
N$60  (via drill 0.25)
  Top 0.2: R11.1 v11.03,42.95 | U7.7 33.86,23.82 v32.93,24.75
  Route2 0.2: v11.03,42.95 v11.03,37.55 | v32.93,37.55 v32.93,24.75
  Route15 0.2: v11.03,37.55 v32.93,37.55
N$61  (via drill 0.25)
  Top 0.2: U6.1 15.81,36.13 v15.83,36.15 | R12.1 28.37,58.29 v28.43,58.35
  Route2 0.2: v16.33,58.25 16.33,36.65 v15.83,36.15
  Route15 0.2: v28.43,58.35 28.33,58.25 v16.33,58.25
N$62  (via drill 0.25)
  Top 0.2: R13.1 33.86,6.76 33.86,15.24 v32.65,16.45 | v17.05,34.65 15.83,34.65 U6.2
  Route2 0.2: v15.73,16.45 15.73,26.73 15.25,27.21 15.25,32.85 v17.05,34.65
  Route15 0.2: v32.65,16.45 v15.73,16.45
N$63  (via drill 0.25)
  Top 0.2: R14.1 v17.53,55.15 | v17.73,33.85 16,33.85 U6.3
  Route2 0.2: v17.53,55.15 17.73,54.95 v17.73,33.85
N$64  (via drill 0.25)
  Top 0.2: R15.1 45.13,8.33 v45.13,8.45 | v13.53,33.35 15.78,33.35 U6.4
  Route2 0.2: v45.13,8.45 v45.13,22.65 | v13.53,22.65 v13.53,33.35
  Route15 0.2: v45.13,22.65 v13.53,22.65
N$65  (via drill 0.25)
  Top 0.2: R16.1 12.53,48.79 v12.53,48.15 | U6.5 15.77,32.75 v12.53,32.75
  Route2 0.2: v12.53,48.15 v12.53,32.75
N$66  (via drill 0.25)
  Top 0.2: R17.1 50.76,15.52 v50.73,15.55 | v17.73,32.05 15.84,32.05 U6.6
  Route2 0.2: v17.73,15.05 v17.73,32.05
  Route15 0.2: v50.73,15.55 28.65,15.55 28.17,15.07 17.75,15.07 v17.73,15.05
N$67  (via drill 0.25)
  Top 0.2: R18.1 9.98,40.5 v10.03,40.45 | v10.13,31.45 15.78,31.45 U6.7
  Route2 0.2: v10.03,40.45 10.03,31.55 v10.13,31.45
N$68  (via drill 0.25)
  Top 0.2: R19.1 52.84,21.86 v50.73,19.75 | v17.13,31.35 16.53,30.75 15.84,30.75 U6.8
  Route2 0.2: v17.13,19.75 v17.13,31.35
  Route15 0.2: v50.73,19.75 v17.13,19.75
N$69
  Top 0.2: R20.1 8.55,30.12 U6.9
N$70  (via drill 0.25)
  Top 0.2: v56.13,33.55 R21.1 | U6.10 16.44,29.46 19.83,32.85 v19.83,33.65
  Route15 0.2: v56.13,33.55 55.21,32.63 20.85,32.63 v19.83,33.65
N$71
  Top 0.2: R22.1 11.62,20.64 12.53,21.55 12.53,26.75 14.61,28.83 U6.11
N$72  (via drill 0.25)
  Top 0.2: R23.1 52.56,42.88 v51.33,41.65 | U6.13 21.65,27.37 v21.63,27.35
  Route2 0.2: v21.62,41.54 21.62,31.75 21.62,27.36 v21.63,27.35
  Route15 0.2: v21.62,41.54 21.7,41.54 21.71,41.55 51.23,41.55 v51.33,41.65
N$73
  Top 0.2: R24.1 17.73,22.52 17.73,26.75 19.81,28.83 U6.14
N$74  (via drill 0.25)
  Top 0.2: R25.1 47.17,49.31 v46.73,49.75 | U6.15 21.64,29.45 v19.83,29.45
  Route2 0.2: v19.21,49.75 19.21,30.07 v19.83,29.45
  Route15 0.2: v46.73,49.75 v19.21,49.75
N$75  (via drill 0.25)
  Top 0.2: R26.1 22.87,11.91 21.73,13.05 v20.13,13.05 | U6.16 21.63,30.15 v20.43,30.15
  Route2 0.2: v20.43,30.15 20.43,13.35 v20.13,13.05
N$76  (via drill 0.25)
  Top 0.2: R27.1 v40.53,50.55 | U6.17 23.1,30.78 v23.13,30.75
  Route2 0.2: v40.53,50.55 v40.53,30.85
  Route15 0.2: v40.53,30.85 40.23,31.15 23.53,31.15 v23.13,30.75
N$77  (via drill 0.25)
  Top 0.2: R29.1 v53.73,18.75 | v34.53,18.75 34.5,18.78 U7.8
  Route15 0.2: v53.73,18.75 v34.53,18.75
N$78  (via drill 0.25)
  Top 0.2: R30.1 8.17,32.51 v9.03,31.65 | U7.9 35.13,22.95 v35.13,25.35
  Route2 0.2: v9.03,31.65 v9.03,25.35
  Route15 0.2: v9.03,25.35 v35.13,25.35
N$79
  Top 0.2: D10.2 58.63,30.92 R28.2
N$80
  Top 0.2: U8.1 36.31,56.27 35.13,57.45 R31.1
N$81  (via drill 0.25)
  Top 0.2: R32.1 30.81,7.87 v27.63,11.05 | v38.73,49.05 36.43,49.05 35.63,49.85 35.63,50.65 U8.2
  Route2 0.2: v38.73,49.05 38.73,12.15 v38.43,11.85
  Route15 0.2: v38.43,11.85 37.63,11.05 v27.63,11.05
N$82  (via drill 0.25)
  Top 0.2: R33.1 22.32,53.64 v23.03,54.35 | v35.13,54.35 35.02,54.24 U8.3
  Route15 0.2: v35.13,54.35 v23.03,54.35
N$83  (via drill 0.25)
  Top 0.2: U8.4 34.36,49.32 35.23,48.45 v39.53,48.45 | v41.53,11.45 v41.54,11.44 R34.1
  Route2 0.2: v39.53,48.45 39.53,40.37 39.35,40.19 39.35,13.63 v41.53,11.45
N$84  (via drill 0.25)
  Top 0.2: R35.1 16.36,48.05 v16.93,48.05 | U8.5 33.63,50.61 v33.63,48.35
  Route15 0.2: v16.93,48.05 33.33,48.05 v33.63,48.35
N$85  (via drill 0.25)
  Top 0.2: U8.6 33.06,52.38 v33.23,52.55 | v46.53,11.65 R36.1
  Route2 0.2: v46.13,52.53 46.15,52.51 46.15,32.75 46.15,12.03 v46.53,11.65
  Route15 0.2: v33.23,52.55 46.11,52.55 v46.13,52.53
N$86  (via drill 0.25)
  Top 0.2: R37.1 8.5,48.02 v8.53,48.05 | U8.7 32.4,49.4 v32.95,48.85
  Route15 0.2: v32.95,48.85 9.33,48.85 v8.53,48.05
N$87  (via drill 0.25)
  Top 0.2: R38.1 58.69,23.19 v58.63,23.25 | v31.03,53.25 31.77,52.51 U8.8
  Route2 0.2: v58.63,23.25 58.63,44.65 v49.93,53.35
  Route15 0.2: v49.93,53.35 49.75,53.17 31.11,53.17 v31.03,53.25
N$88  (via drill 0.25)
  Top 0.2: R39.1 7.73,35.13 v7.73,36.75 | v30.23,47.45 31.1,48.32 U8.9
  Route2 0.2: v31.13,36.75 31.13,41.83 29.85,43.11 29.85,47.09 30.21,47.45 v30.23,47.45
  Route15 0.2: v7.73,36.75 v31.13,36.75
N$89  (via drill 0.25)
  Top 0.2: R40.1 v57.33,28.66 v57.33,28.65 | v30.73,51.95 30.44,51.66 U8.10
  Route2 0.2: v57.33,28.65 57.33,44.95 v49.93,52.35
  Route15 0.2: v49.93,52.35 49.53,51.95 v30.73,51.95
N$90  (via drill 0.25)
  Top 0.2: R41.1 8.51,23.75 v9.73,23.75 | v29.83,52.15 29.83,50.69 U8.11
  Route2 0.2: v29.33,24.25 29.5,24.42 29.5,51.82 v29.83,52.15
  Route15 0.2: v29.33,24.25 10.23,24.25 v9.73,23.75
N$91  (via drill 0.25)
  Top 0.2: U8.13 28.57,44.83 v28.49,44.75 | R42.1 56.23,40 v56.23,39.05
  Route15 0.2: v28.49,44.75 55.23,44.75 56.23,43.75 v56.23,39.05
N$92  (via drill 0.25)
  Top 0.2: R43.1 14.41,15.65 v15.03,15.65 | v27.91,46.35 29.23,46.35 29.83,45.75 29.81,45.73 U8.14
  Route2 0.2: v27.91,46.35 27.91,15.67 v27.93,15.65
  Route15 0.2: v15.03,15.65 v27.93,15.65
N$93  (via drill 0.25)
  Top 0.2: R44.1 51.98,46.9 v51.93,46.85 | v30.43,46.25 30.43,44.84 U8.15
  Route15 0.2: v51.93,46.85 51.13,47.65 31.83,47.65 v30.43,46.25
N$94  (via drill 0.25)
  Top 0.2: v30.43,43.59 30.68,43.84 30.73,43.84 31.1,44.22 U8.16 | R45.1 20.5,9.91 18.73,11.68 v18.73,13.75
  Route2 0.2: v26.75,43.55 26.73,43.53 v26.73,13.75
  Route15 0.2: v30.43,43.59 26.79,43.59 v26.75,43.55 | v26.73,13.75 v18.73,13.75
N$95
  Top 0.2: R46.1 42.95,50.17 40.53,47.75 33.13,47.75 31.77,46.38 U8.17
N$96  (via drill 0.25)
  Top 0.2: R47.1 v11.22,21.94 v11.23,21.95 | v36.43,21.65 36.43,22.91 U7.11
  Route15 0.2: v11.23,21.95 36.13,21.95 v36.43,21.65
N$97  (via drill 0.25)
  Top 0.2: R48.1 53.9,39.42 v53.83,39.35 | v37.83,28.75 37.13,28.75 U7.13
  Route2 0.2: v53.83,39.35 v53.83,28.15
  Route15 0.2: v53.83,28.15 38.43,28.15 v37.83,28.75
N$98
  Top 0.2: D13.2 12.91,11.03 R49.2
N$99
  Top 0.2: D14.2 50.34,49.23 R50.2
N$100
  Top 0.2: D15.2 21.58,8.55 R51.2
N$101
  Top 0.2: D16.2 41.91,55.03 R52.2
N$102  (via drill 0.25)
  Top 0.2: U4.17 38.09,62.31 v38.03,62.25 | v30.93,42.95 30.53,42.55 U1.14 | v38.03,43.65 38.63,44.25 SPI_CS.TP
  Route2 0.2: v38.03,62.25 v38.03,43.65
  Route15 0.2: v38.03,43.65 31.63,43.65 v30.93,42.95
N$103  (via drill 0.25, 0.35)
  Top 0.2: R53.1 24.49,47.16 24.34,47.01 24.34,45.58 JP1.4 22.81,42.67 v22.83,42.65 | v28.81,42.63 29.31,42.63 29.73,42.21 U1.15 | MOSI.TP 15.33,41.25 v17.03,42.95
  Route15 0.2: v28.81,42.63 28.79,42.65 v22.83,42.65 22.55,42.93 17.05,42.93 v17.03,42.95
N$104
  Top 0.2: R55.1 25.91,47.15 JP1.1 28.13,43.81 28.13,41.95 28.76,41.32 U1.16 28.6,41.65 MISO.TP
N$105  (via drill 0.25, 0.35)
  Top 0.2: JP1.3 21.63,45.41 v21.63,42.35 | R54.1 27.3,47.38 v27.33,47.35 | v27.33,40.65 27.43,40.55 U1.17 25.93,39.82 v25.93,39.85 | SPI_CLK.TP 19.73,39.95 v20.43,39.95
  Route2 0.2: v27.33,47.35 v27.33,40.65 | v25.93,39.85 24.13,39.85 v21.63,42.35
  Route15 0.2: v20.43,39.95 25.83,39.95 v25.93,39.85
N$106  (via drill 0.25)
  Top 0.2: v31.73,42.75 31.33,42.35 U1.13 | U4.3 25.33,70.75 v31.33,70.75
  Route2 0.2: v31.33,70.75 31.73,70.35 v31.73,42.75
  Bottom 0.2: DWM_RST.TP v31.73,42.75
N$107  (via drill 0.25)
  Top 0.152: JP3.5 40.63,69.95 | 40.63,69.95 | 40.63,69.95 39.79,70.79 U4.22
  Top 0.2: v34.43,34.95 34.43,32.82 U1.32 | U4.22 36.37,70.79 v36.33,70.75
  Route2 0.2: v34.53,70.75 34.43,70.65 v34.43,34.95
  Route15 0.2: v34.53,70.75 v36.33,70.75
  Bottom 0.2: DWM_IRQ.TP v34.43,34.95
N$108
  Top 0.2: U1.8 37.06,40.85 38.48,40.85 Y1.3
N$109
  Top 0.2: U1.7 38.47,39.02 Y1.1
N$110  (via drill 0.25)
  Top 0.2: U1.29 32.13,33.75 v31.43,34.45 | v24.73,39.15 23.68,39.15 R60.1 23.08,39.2 19.03,43.25 19.03,45.35 JP1.5
  Route2 0.2: v24.73,39.15 24.83,39.05 v24.83,35.45 | v21.03,72.15 21.03,62.02 20.76,61.75 20.76,47.08 JP1.5
  Route15 0.2: v31.43,34.45 30.43,35.45 v24.83,35.45 | JP3.6 v21.03,72.15
N$111  (via drill 0.25)
  Top 0.2: R53.2 24.49,52.31 v24.53,52.35 | U4.18 36.37,65.19 v36.33,65.15
  Route2 0.2: v22.93,65.25 22.93,58.25 24.53,56.65 v24.53,52.35
  Route15 0.2: v36.33,65.15 36.23,65.25 v22.93,65.25
N$112  (via drill 0.25)
  Top 0.2: R54.2 27.3,52.32 v27.33,52.35 | U4.20 36.37,67.99 v36.33,67.95
  Route2 0.2: v27.33,52.35 v27.33,67.95
  Route15 0.2: v27.33,67.95 v36.33,67.95
N$113  (via drill 0.25)
  Top 0.2: R55.2 25.91,52.33 v25.93,52.35 | U4.19 36.37,66.59 v36.33,66.55
  Route2 0.2: v23.53,66.55 23.53,58.75 25.93,56.35 v25.93,52.35
  Route15 0.2: v23.53,66.55 v36.33,66.55
N$114  (via drill 0.25, 0.35)
  Top 0.2: U1.1 v36.03,33.45 | TONE.TP 42.83,37.95 v42.73,38.05
  Bottom 0.2: v36.03,33.45 36.28,33.2 R56.2 39.54,34.3 U5.3 42.19,34.3 42.73,34.85 v42.73,38.05
N$115
  Bottom 0.2: C3.1 46.63,28.3 46.63,29.7 R57.1 47.73,30.8 47.73,34.05 | 47.73,34.05 47.48,34.3 U5.6 | L2.1 47.73,34.05
N$116
  Bottom 0.2: L2.2 51.78,29.4 C5.1 51.78,26.01 JP2.1
N$117
  Bottom 0.2: C3.2 45.13,28.15 44.33,28.95 | 44.33,28.95 44.33,29.1 R57.2 | 44.33,28.95 R58.2 43.68,32 42.63,33.05 42.62,33.03 U5.2
N$118
  Bottom 0.2: C4.1 41.93,29 R58.1
N$119  (via drill 0.35)
  Top 0.2: U4.4 24.64,68.74 23.96,68.74 v23.27,68.05
  Bottom 0.2: DWM_GP7.TP 27.53,72.31 v23.27,68.05
N$120  (via drill 0.35)
  Top 0.2: v21.39,61.49 U4.9
  Bottom 0.2: v21.39,61.49 21.39,68.39 DWM_GP6.TP
N$121  (via drill 0.35)
  Top 0.2: U4.10 27.54,60.84 27.54,60.01 19.27,60.01 v18.77,60.51
  Bottom 0.2: v18.77,60.51 18.77,65.81 DWM_GP5.TP
N$122  (via drill 0.35)
  Top 0.2: v17.13,59.95 17.42,59.66 28.44,59.66 28.94,60.16 28.94,60.84 U4.11
  Bottom 0.2: DWM_GP4.TP 16.43,60.65 v17.13,59.95
N$123  (via drill 0.35)
  Top 0.2: U4.12 30.34,60.84 30.34,60.16 29.49,59.31 14.23,59.31 v14.21,59.33
  Bottom 0.2: v14.21,59.33 12.73,57.85 DWM_GP3.TP
N$124  (via drill 0.35)
  Top 0.2: v32.36,63.95 32.39,63.92 U4.13
  Bottom 0.2: DWM_GP2.TP 35.46,60.85 v32.36,63.95
N$125  (via drill 0.35)
  Top 0.2: U4.14 33.73,61.55 v33.73,64.25
  Bottom 0.2: DWM_GP1.TP 38.45,62.65 38.27,62.83 36.7,62.83 36.49,62.62 35.36,62.62 v33.73,64.25
N$126  (via drill 0.35)
  Top 0.2: v35.23,64.15 35.23,61.53 U4.15
  Bottom 0.2: DWM_GP0.TP 39.93,64.15 v35.23,64.15
N$127  (via drill 0.35)
  Top 0.2: U4.2 24.15,72.19 v22.71,73.63
  Bottom 0.2: WKUP.TP 22.71,73.83 v22.71,73.63
N$128  (via drill 0.35)
  Top 0.2: v25.27,79.59 25.27,73.61 U4.1
  Bottom 0.2: EXTON.TP 27.23,81.55 v25.27,79.59
RD_A  (via drill 0.25)
  Top 0.2: U1.9 34.53,41.35 | 34.53,41.35 34.53,42.55 35.65,43.67 U8.23 | RD_A.TP 46.03,40.75 v44.31,40.75 | v35.93,40.75 35.13,40.75 34.53,41.35
  Route15 0.2: v44.31,40.75 v35.93,40.75
RD_B  (via drill 0.25)
  Top 0.2: U8.22 35.02,43.74 33.73,42.45 U1.10 33.63,41.22 v33.63,39.25 | RD_B.TP 43.53,42.15 v42.73,42.15
  Route2 0.2: v42.73,42.15 v42.73,39.25
  Route15 0.2: v42.73,39.25 v33.63,39.25
RD_C
  Top 0.2: U1.11 32.93,42.25 34.36,43.68 U8.21 34.39,44.86 34.39,45.47 34.93,46.02 42.7,46.02 RD_C.TP
RD_D
  Top 0.2: U1.12 32.13,42.25 33.7,43.81 U8.20 33.73,44.86 33.73,45.47 34.73,46.47 40.35,46.47 RD_D.TP
SW1  (via drill 0.25)
  Top 0.2: v38.13,27.25 38.29,27.25 U3.4 45.79,19.75 SW1.TP | v25.93,38.15 27.36,38.15 U1.19
  Route2 0.2: v25.93,38.15 25.53,37.75 v25.53,27.95
  Route15 0.2: v38.13,27.25 37.43,27.95 v25.53,27.95
SW2  (via drill 0.25)
  Top 0.2: U1.22 26.06,35.82 25.73,36.15 v23.93,36.15 | v23.93,27.95 23.93,27.87 21.41,25.35 U2.4 23.87,21.75 SW2.TP
  Route2 0.2: v23.93,36.15 v23.93,27.95
VCC  (via drill 0.35)
  Bottom 0.508: 40.33,9.27 v40.33,8.85 | C2.2 40.48,9.27 40.33,9.27 | U5.7 44.45,33.03 v43.73,33.75 | 38.6,9.94 IC2.5 39.63,9.91 R1.2 40.33,9.27
  pour Top: -4.57,68.45 64.03,68.45 64.73,67.75 64.73,-0.25 63.73,-1.25 -2.27,-1.25 -5.27,1.75 -5.27,67.75

## Text on the board
bNames: TRACKER_V2 / The Fighting Mongooses / Leo Regan Robert Yousef / Garcia Garner Fogg Alkhelaifi / 11/20/2020 / PSU ECE411 Fall / Team 10